# Altium PCB LogicProbe.PcbDoc
Units mil, origin at the board's own origin, x right, y up, seen from the top; angles counter-clockwise.
Board outline 6000 x 4000 mil, 2 copper layers (Top Layer, Bottom Layer); 49 components, 33 nets, 157 pads, 0 vias.
Unrouted connection lines stored in the file: 80.
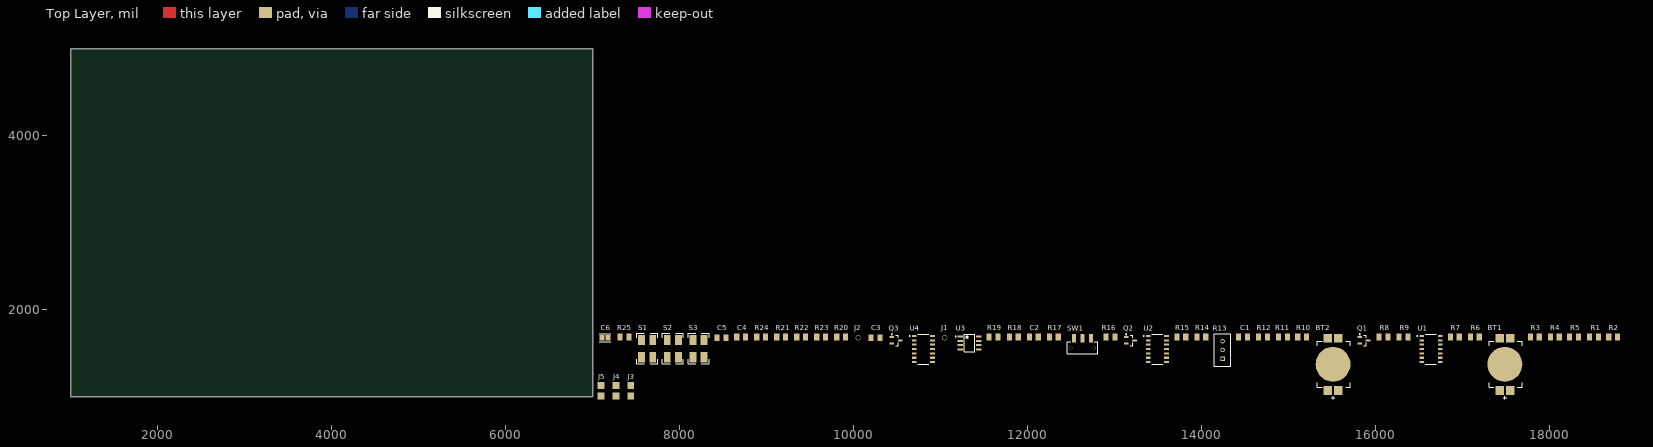
[diagram p0: Top Layer view]
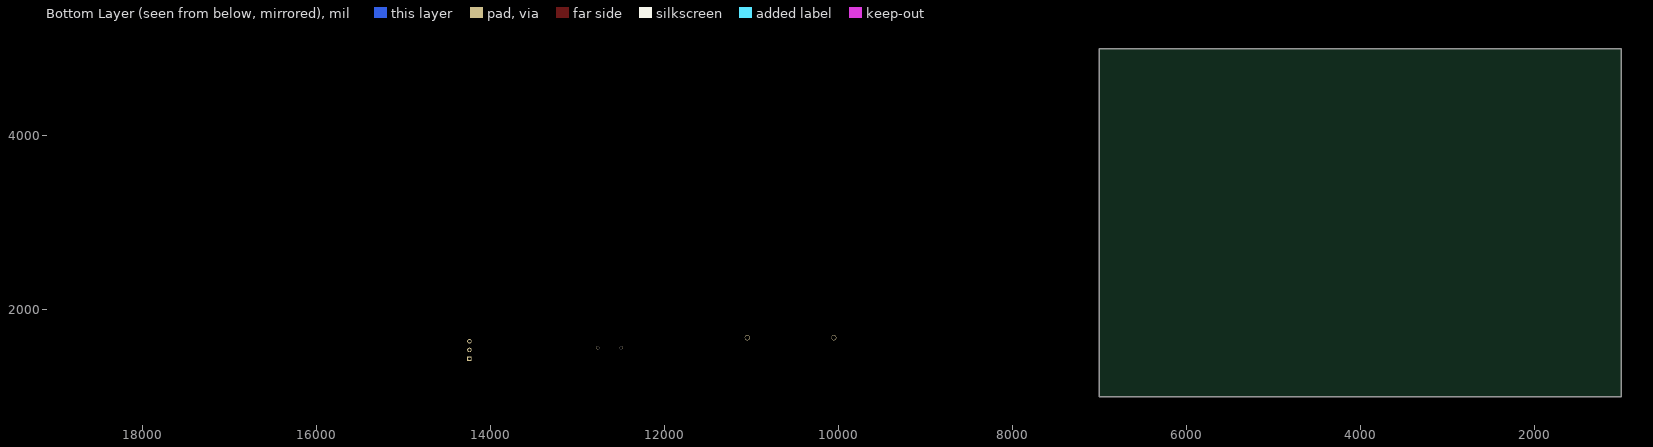
[diagram p1: Bottom Layer view, seen from below]

## Layer stack, top to bottom
Top Solder: solder mask 0.4, Solder Resist, Dk 3.5
Top Layer: signal copper 1.4
Dielectric 1: dielectric 12.6, FR-4, Dk 4.8
Bottom Layer: signal copper 1.4
Bottom Solder: solder mask 0.4, Solder Resist, Dk 3.5

## Board outline
1000,1000 7000,1000 7000,5000 1000,5000

## Design rules (kind name [scope] priority, off if disabled: settings)
Clearance [All] p1: gap=10 ignorepadtopadclearanceinfootprint=FALSE except(0: Arc-Hole Track-Hole SMDPad-Hole THPad-Hole Via-Hole Fill-Hole Poly-Hole Region-Hole Text-Hole)
PolygonConnect [All] p1: connectstyle=Relief reliefconductorwidth=10 reliefentries=4 polygonreliefangle="90 Angle" airgapwidth=10
RoutingVias [All] p1: holewidth=28 width=50 viastyle="Through Hole" minholewidth=28 minwidth=50 maxholewidth=28 maxwidth=50
SolderMaskExpansion [All] p1: expansion=4 istentingtop=FALSE
Width [All] p1: maxlimit=10 minlimit=10 preferedwidth=10
30 further rules are at their usual default settings.

## Classes and differential pairs
component class pulse_generator_pen: BT1 BT2 C1 C2 C3 C4 C5 C6 J1 J2 J3 J4 J5 J10 J11 J12 Q1 Q2 Q3 R1 R2 R3 R4 R5 R6 R9 R11 R12 R13 R14 R15 R16 R17 R18 R19 R20 R24 S1 S2 SW1 U1 U2 U3 U4

## Components (designator, comment, footprint, x,y, rotation, side; value= is the part's Value field where it differs from the comment)
BT1 "BK-916-TR" FP-BK-916-TR-MFG 17495,1375 r90 top
BT2 "BK-916-TR" FP-BK-916-TR-MFG 15520,1375 r90 top
C1 "P.N." 0805_R 14475,1690 r0 top
C2 "P.N." 0805_R 12070,1690 r0 top
C3 "P.N." 0805_R 10250,1680 r0 top
C4 "P.N." 0805_R 8705,1690 r0 top
C5 "P.N." 0805_R 8480,1680 r0 top
C6 "CL21B104KBCNNNC" FP-CL21-IPC_A 7140,1680 r0 top
J1 "HEADER_1POS_MALE" HEADER_1POS_MALE_VERT_2.54MM 11045,1680 r0 top
J2 "HEADER_1POS_MALE" HEADER_1POS_MALE_VERT_2.54MM 10050,1680 r0 top
J3 "JUMPER_RECT" JUMPER_RECT 7435,1070 r90 top
J4 "JUMPER_RECT" JUMPER_RECT 7265,1070 r90 top
J5 "JUMPER_RECT" JUMPER_RECT 7095,1070 r90 top
Q1 "2N7002" INF-PG-SOT23_M 15865,1650 r0 top
Q2 "2N7002" INF-PG-SOT23_M 13180,1650 r0 top
Q3 "2N7002" INF-PG-SOT23_M 10485,1650 r0 top
R1 "P.N." 0805_R 18510,1690 r0 top
R2 "P.N." 0805_R 18730,1690 r0 top
R3 "P.N." 0805_R 17830,1690 r0 top
R4 "P.N." 0805_R 18060,1690 r0 top
R5 "P.N." 0805_R 18280,1690 r0 top
R6 "P.N." 0805_R 17140,1690 r0 top
R7 "P.N." 0805_R 16910,1690 r0 top
R8 "P.N." 0805_R 16090,1690 r0 top
R9 "P.N." 0805_R 16320,1690 r0 top
R10 "P.N." 0805_R 15155,1690 r0 top
R11 "P.N." 0805_R 14935,1690 r0 top
R12 "P.N." 0805_R 14705,1690 r0 top
R13 "3296W-1-102LF" BOUR-3296W-1-3 14240,1540 r90 top
R14 "P.N." 0805_R 13995,1690 r0 top
R15 "P.N." 0805_R 13765,1690 r0 top
R16 "P.N." 0805_R 12950,1690 r0 top
R17 "P.N." 0805_R 12300,1690 r0 top
R18 "P.N." 0805_R 11840,1690 r0 top
R19 "P.N." 0805_R 11605,1690 r0 top
R20 "P.N." 0805_R 9855,1690 r0 top
R21 "P.N." 0805_R 9165,1690 r0 top
R22 "P.N." 0805_R 9395,1690 r0 top
R23 "P.N." 0805_R 9625,1690 r0 top
R24 "P.N." 0805_R 8935,1690 r0 top
R25 "P.N." 0805_R 7365,1690 r0 top
S1 "TACT_SWITCH_SMD_5x3MM" TACT_SWITCH_SMD_5x3MM 7625,1555 r90 top
S2 "TACT_SWITCH_SMD_5x3MM" TACT_SWITCH_SMD_5x3MM 7920,1555 r90 top
S3 "TACT_SWITCH_SMD_5x3MM" TACT_SWITCH_SMD_5x3MM 8215,1555 r90 top
SW1 "JS102011SAQN" FP-JS102011SAQN-MFG 12630,1565 r0 top
U1 "LM324DT" FP-SO-14-MFG 16635,1550 r0 top
U2 "LM324DT" FP-SO-14-MFG 13490,1550 r0 top
U3 "SE555DR" FP-D0008A-MFG 11330,1620 r0 top
U4 "LM324DT" FP-SO-14-MFG 10800,1550 r0 top

## Footprints (in the part's own frame and the unit in brackets; to place one, negate y for a bottom-side part, rotate by r counter-clockwise, add the part's x,y. Pads: shape width x height; smd on the part's side, far side on the other; paste and mask are expansions set on the pad)
0805_R [mm] "Chip Resistor, 2-Leads, Body 0805, IPC Compliant"
  rect 1.5x2 smd: 1(-1.3,0) 2(1.3,0)
  body extent -1.01,-0.64 1.01,0.64, height 0.51
BOUR-3296W-1-3 [mm] "THD, 3-Leads, Body 9.53x4.83mm, Pitch 2.54mm"
  rect 1.3x1.3 hole 0.8: 1(-2.54,0)
  round 1.3 hole 0.8: 2(0,0) 3(2.54,0)
  silkscreen extent -4.76,-2.41 4.76,2.42, body extent -4.76,-2.41 4.76,2.42, height 11.55
FP-BK-916-TR-MFG [mm]
  round 10.2 smd paste-1000 mask+0: 1(0,0.25)
  rect 2.5x2.5 smd paste+0 mask+0: 2(-7.65,-1.3) 2(-7.65,1.8) 2(7.65,-1.3) 2(7.65,1.8)
  silkscreen extent -10.28,-4.8 6.75,4.8, body extent -9,-4.95 9,5.45, height 0.25
FP-CL21-IPC_A [mil]
  rect 57.27x61.27 smd paste+0 mask+0: 1(-36.45,0) 2(36.45,0)
  silkscreen extent -65,-46 65,46, body extent -85,-50 85,50, height 10
FP-D0008A-MFG [mm]
  rrect17% 1.55x0.6 smd paste+0 mask+0: 1(-2.7,1.905) 2(-2.7,0.635) 3(-2.7,-0.635) 4(-2.7,-1.905) 5(2.7,-1.905) 6(2.7,-0.635) 7(2.7,0.635) 8(2.7,1.905)
  silkscreen extent -4.17,-2.5 1.5,2.5, body extent -3.57,-2.75 3.57,2.75, height 0.25
FP-JS102011SAQN-MFG [mm]
  rect 1.2x2.5 smd paste+0 mask+0: 1(-2.5,2.75) 2(0,2.75) 3(2.5,2.75)
  round 0.9 hole 0.9 unplated paste-2539.97 mask+0: ""(-3.4,0) ""(3.4,0)
  silkscreen extent -4.5,-1.8 4.5,1.8, body extent -4.6,-3.9 4.6,4.1, height 0.25
FP-SO-14-MFG [mm]
  rect 1.35x0.6 smd paste+0 mask+0: 1(-2.675,3.81) 2(-2.675,2.54) 3(-2.675,1.27) 4(-2.675,0) 5(-2.675,-1.27) 6(-2.675,-2.54) 7(-2.675,-3.81) 8(2.675,-3.81) 9(2.675,-2.54) 10(2.675,-1.27) 11(2.675,0) 12(2.675,1.27) 13(2.675,2.54) 14(2.675,3.81)
  silkscreen extent -4.15,-4.38 1.63,4.38, body extent -3.45,-4.47 3.45,4.47, height 0.25
HEADER_1POS_MALE_VERT_2.54MM [mm]
  round 1.5 / inner round 2 / far side round 1.5 hole 1.25: 1(0,0)
  body extent -1.27,-1.27 1.27,1.27, height 8.88
INF-PG-SOT23_M [mm] "SOT23, 3-Leads, Body 2.9x1.3mm, Pitch 0.95mm, IPC Low Density"
  rect 1.35x0.6 smd: 1(-1.2,0.95) 2(-1.2,-0.95) 3(1.2,0)
  silkscreen extent -1.32,-1.5 0.7,1.92, body extent -0.7,-1.5 0.7,1.5, height 1.1
JUMPER_RECT [mm] "Small rectangular jumper"
  rect 2x2 smd: 1(-1.524,0) 2(1.524,0)
  body extent -2.54,-1.02 2.54,1.02
TACT_SWITCH_SMD_5x3MM [mm] "Switch blanco chico"
  rect 3x2 smd: 1(-2.54,1.626) 2(-2.54,-1.6) 3(2.54,-1.6) 4(2.54,1.626)
  silkscreen extent -4.44,-3.07 4.5,3.05, body extent -2.55,-1.6 2.55,1.6, height 2.21

## Part data
BT1 BT2: library part CMP-136216-000004-1, "BATTERY RETAINER COIN 12MM SMD", Mount="Surface Mount", Number of Cells=1, Termination=SMD/SMT
C1 C2 C4 C5: library part 0805_C, "Generic 0805 Capacitor", Capacitance=100nF, Dielectric=XR7, Voltage Rating=10V
C3: library part 0805_C, "Generic 0805 Capacitor", Capacitance=22uF, Dielectric=XR7, Voltage Rating=10V
C6: library part CMP-2000-05017-2, "CL21 Series 0805 100nF 50V ±10% Tolerance X7R Multilayer Ceramic Chip Capacitor", Capacitance=100nF, Case Code (Imperial)=0805, Case Code (Metric)=2012, Dielectric=X7R, Max Operating Temperature=125°C, Min Operating Temperature=-55°C, Tolerance=10%, Voltage=50V, Case/Package=0805, Contact Plating=Tin, Depth=1.25mm, Height=0.85mm, Lead Free="Lead Free", Length=2mm, Material=Ceramic, Mount="Surface Mount", Packaging="Tape and Reel", Radiation Hardening=No, Thickness=0.037inch, Voltage Rating=50V, Voltage Rating (DC)=50V, Width=0.049inch
J3 J4 J5: "Small rectangular jumper"
Q1 Q2 Q3: library part CMP-1149-00026-1, "N-Channel OptiMOS Small-Signal-Transistor, 60 V VDS, 0.3 A ID, -55 to 150 degC, PG-SOT23, Reel, Green", Manufacturer=Infineon, ComponentLink1Description="Manufacturer URL", ComponentLink1URL=http://www.infineon.com/, ComponentLink2Description=Datasheet, ComponentLink2URL=http://www.infineon.com/dgdl/2N7002_Rev2.4.pdf?folderId=db3a3043156fd573011622e10b5c1f67&fileId=db3a304319bc939a0119c2a9461e79e6, ComponentLink3Description="Package Specification", ComponentLink3URL=http://www.infineon.com/dgdl/SOT23-Package_Overview.pdf?folderId=db3a30431936bc4b0119532290053c66&fileId=db3a30431936bc4b0119533468123c85, DatasheetVersion="Rev. 2.4", Green=TRUE, Halogen-free=TRUE, ID (max)="0.3Â A", IDpuls (max)="1.2Â A", Mounting Technology="Surface Mount", PackageDescription="3-Pin Small Outline Transistor Package, 2.9 x 1.3 mm Body, 0.95 mm Pitch", PackageReference=PG-SOT23, PackageVersion=Apr-08, Packing=Reel, PartNumber=2N7002, Ptot (max)="0.5Â W", QG="0.4Â nC", RDS (on) (max)="3,000 mOhm", RDS (on) (max) (@4.5V)="4,000 mOhm", RthJA (max)="250 K/W", VDS (max)="60 V", VGS(th) (max)="2.5Â V", VGS(th) (min)="1.5Â V"
R1: library part 0805_R, "Generic 0805 Resistor", Power Rating=0.5W, Resistance=132R
R2 R4 R9: library part 0805_R, "Generic 0805 Resistor", Power Rating=0.5W, Resistance=0R
R3: library part 0805_R, "Generic 0805 Resistor", Power Rating=0.5W, Resistance=971R
R5 R6 R7 R10 R11 R12 R14 R15 R16 R17 R18 R19 R20 R21 R22 R23 R24 R25: library part 0805_R, "Generic 0805 Resistor", Power Rating=0.5W, Resistance=103R
R8: library part 0805_R, "Generic 0805 Resistor", Power Rating=0.5W, Resistance=501R
R13: library part CMP-1747-00002-1, "Square Trimpot(R) Trimming Potentiometer, 1000 Ohm, -55 to 125 degC, 3-Pin THD, RoHS, Tube", Case Code (Imperial)=0603, Case Code (Metric)=1608, Max Operating Temperature="155 degC", Min Operating Temperature="-55 degC", Package Quantity=5000, Power Rating="100 mW", Resistance="4.7 kohm", Tolerance=1%, Voltage Rating="75 V", Case\Package=0603, ComponentLink1Description="Manufacturer URL", ComponentLink1URL=http://www.bourns.com/, ComponentLink2Description=Datasheet, ComponentLink2URL=http://www.bourns.com/docs/Product-Datasheets/3296.pdf, DatasheetVersion=May-16, Height="0.45 mm", Length="1.6 mm", Mount="Surface Mount", PackageDescription="3-Pin Through Hole Device, Body 9.53 x 4.83 mm, Pitch 2.54 mm", PackageReference=3296W-1-3, Packaging="Tape and Reel", Pins=2, Radiation Hardening=No, REACH SVHC=Yes, RoHSCompliant=true, Weight="7.1E-05 oz", Width="0.8 mm"
SW1: library part CMP-2000-06501-2, "SWITCH SLIDE SPDT 300MA 6V", Case/Package=100, Contact Current Rating=300mA, Contact Resistance=70mR, Max Operating Temperature=85°C, Max Voltage Rating (DC)=6V, Min Operating Temperature=-40°C, Package Quantity=1, Actuator Length=2mm, Actuator Material=Nylon, Actuator Type=Standard, Contact Material="Copper Alloy", Contact Plating=Silver, Current Rating=300mA, Electrical Life=5000Cycles, Housing Material=Nylon, Illumination Type=Non-Illuminated, Lead Free="Lead Free", Length=9mm, Max Current Rating=300mA, Mount="Surface Mount", Orientation="Right Angle", Packaging="Tape and Reel", Radiation Hardening=No, REACH SVHC="No SVHC", Switch Function=On-On, Switch Travel=2mm, Termination="Gull Wing", Throw Configuration=SPDT, Voltage Rating (DC)=6V
U1 U2 U4: library part CMP-12131-000005-1, "IC OPAMP GP 4 CIRCUIT 14SO", Input Bias Current=0.02uA, Input Offset Voltage=2mV, Manufacturer=STMicroelectronics, Max Dual Supply Voltage=15V, Max Junction Temp=+150°C, Max Supply Voltage=30V, Min Dual Supply Voltage=1.5V, Min Supply Voltage=3V, Nominal Supply Current=0.7-1.5mA, Output Current per Channel=20-50mA, Package=SO-14, Temperature="0°C to +70°C", Temperature Range High=+70°C, Temperature Range Low=0°C, Voltage Gain=100dB, Automotive=No, Bandwidth=1.3MHz, Category=IC, ComponentLink2Description=Datasheet, ComponentLink2URL=https://www.st.com/content/ccc/resource/technical/document/datasheet/bd/fc/46/43/26/8f/40/7f/CD00001046.pdf/files/CD00001046.pdf/jcr:content/translations/en.CD00001046.pdf, Device Class L1="Integrated Circuits (ICs)", Device Class L2="Linear ICs", Device Class L3="Amplifiers - Op Amps", Digikey Description="IC OPAMP GP 4 CIRCUIT 14SO", Footprint Url=https://www.st.com/content/ccc/resource/technical/document/datasheet/group3/10/8a/e6/12/f8/e8/49/ce/DM00366438/files/DM00366438.pdf/jcr:content/translations/en.DM00366438.pdf, Gain Bandwidth=1.3MHz, Height=1.75mm, Lead Free=Yes, Manufacturer Part Number=LM324DT, Mouser Description="LM324 Series 32 V 1.3 MHz Low Power Quad Operational Amplifier - SOIC-14", Number of Channels=4, Octopart=https://octopart.com/lm324dt-stmicroelectronics-39579146, RoHS=TRUE, Standoff Height=0.1mm
U3: library part CMP-04858-000018-1, "IC OSC SGL TIMER 100KHZ 8-SOIC", Case/Package=SOIC, Frequency=100kHz, High Level Output Current=-200mA, Low Level Output Current=200mA, Max Operating Temperature=125°C, Max Supply Voltage=18V, Min Operating Temperature=-55°C, Min Supply Voltage=4.5V, Nominal Supply Current=4mA, Operating Supply Current=10mA, Package Quantity=2500, Quiescent Current=12mA, Contact Plating=Gold, Lead Free="Lead Free", Mount="Surface Mount", Number of Pins=8, Number of Timers/Counters=1, Packaging="Tape and Reel", Radiation Hardening=No, REACH SVHC="No SVHC", RoHS Compliant=Yes, Series=-, Supply Current=4mA, Weight=0.002677oz

## Nets (pads, with @x,y where several pads share a name; then routed paths per layer and width w, separated by ;. In a path a pad name is that pad's centre, name@x,y a point inside that pad or via, vN(x,y) a via of type N, cw(c..) or ccw(c..) an arc to the next point about the centre after c; other vN are vias at no path point)
1Hz: Q1.3 R2.2
1Hz_OUT: R13.2 R13.3
1kHz: R4.2
1kHz_OUT: Q2.2
3V0-ref: U1.1 U1.2 U1.9 U2.9 U4.9
6V0: R1.1 R3.1 R6.2 R8.1 R21.2 R22.2 R23.2 SW1.2 U1.4
10kHz: Q2.3 Q3.3 R9.2
10kHz_OUT: Q3.2
Buffer_1Hz: R5.2 R7.2 R11.1 U1.8
Buffer_1kHz: R14.2 R15.2 R16.1 U2.8
Buffer_10kHz: R18.2 R19.2 R20.1 U4.8
Enable_1Hz: C1.2 R5.1 R7.1 R12.2 S1.1 U1.10
Enable_1kHz: C2.2 R14.1 R15.1 R17.2 S2.1 U2.10
Enable_10kHz: C4.2 R18.1 R19.1 R24.2 S3.1 U4.10
GND: BT2.1 C1.1 C2.1 C3.1 C4.1 C5.1 C6.1 R10.1 R12.1 R17.1 R24.1 U1.11 U3.1
NetBT1_1: BT1.1 BT2.2
NetC3_2: C3.2 U3.4 U3.8
NetC5_2: C5.2 U3.5
NetC6_2: C6.2 R25.2 U3.2 U3.6
NetJ1_1: J1.1 U3.3
NetQ1_1: Q1.1 R11.2
NetQ1_2: Q1.2 R13.1
NetQ2_1: Q2.1 R16.2
NetQ3_1: Q3.1 R20.2
NetR1_2: R1.2 R2.1
NetR3_2: R3.2 R4.1
NetR6_1: R6.1 R10.2 U1.3
NetR8_2: R8.2 R9.1
RC_node: R25.1 U3.7
sw-H-1: R21.1 S1.4
sw-H-2: R22.1 S2.4
sw-H-3: R23.1 S3.4
V_BAT: BT1.2 SW1.3
pads on no net: J2.1 J3.1 J3.2 J4.1 J4.2 J5.1 J5.2 S1.2 S1.3 S2.2 S2.3 S3.2 S3.3 SW1. SW1.1 U1.5 U1.6 U1.7 U1.12 U1.13 U1.14 U2.1 U2.2 U2.3 U2.4 U2.5 U2.6 U2.7 U2.11 U2.12 U2.13 U2.14 U4.1 U4.2 U4.3 U4.4 U4.5 U4.6 U4.7 U4.11 U4.12 U4.13 U4.14